# Altium PCB MENB-C-H-DET-S-V1.2 2019.5.27.PcbDoc (part 2 of 2)
Units mil, origin at the board's own origin, x right, y up, seen from the top; angles counter-clockwise.
Board outline 6102.36 x 4921.26 mil, 4 copper layers (Top Layer, GND, PWR, Bottom Layer); 148 components, 226 nets, 628 pads, 138 vias.
Unrouted connection lines stored in the file: 1.
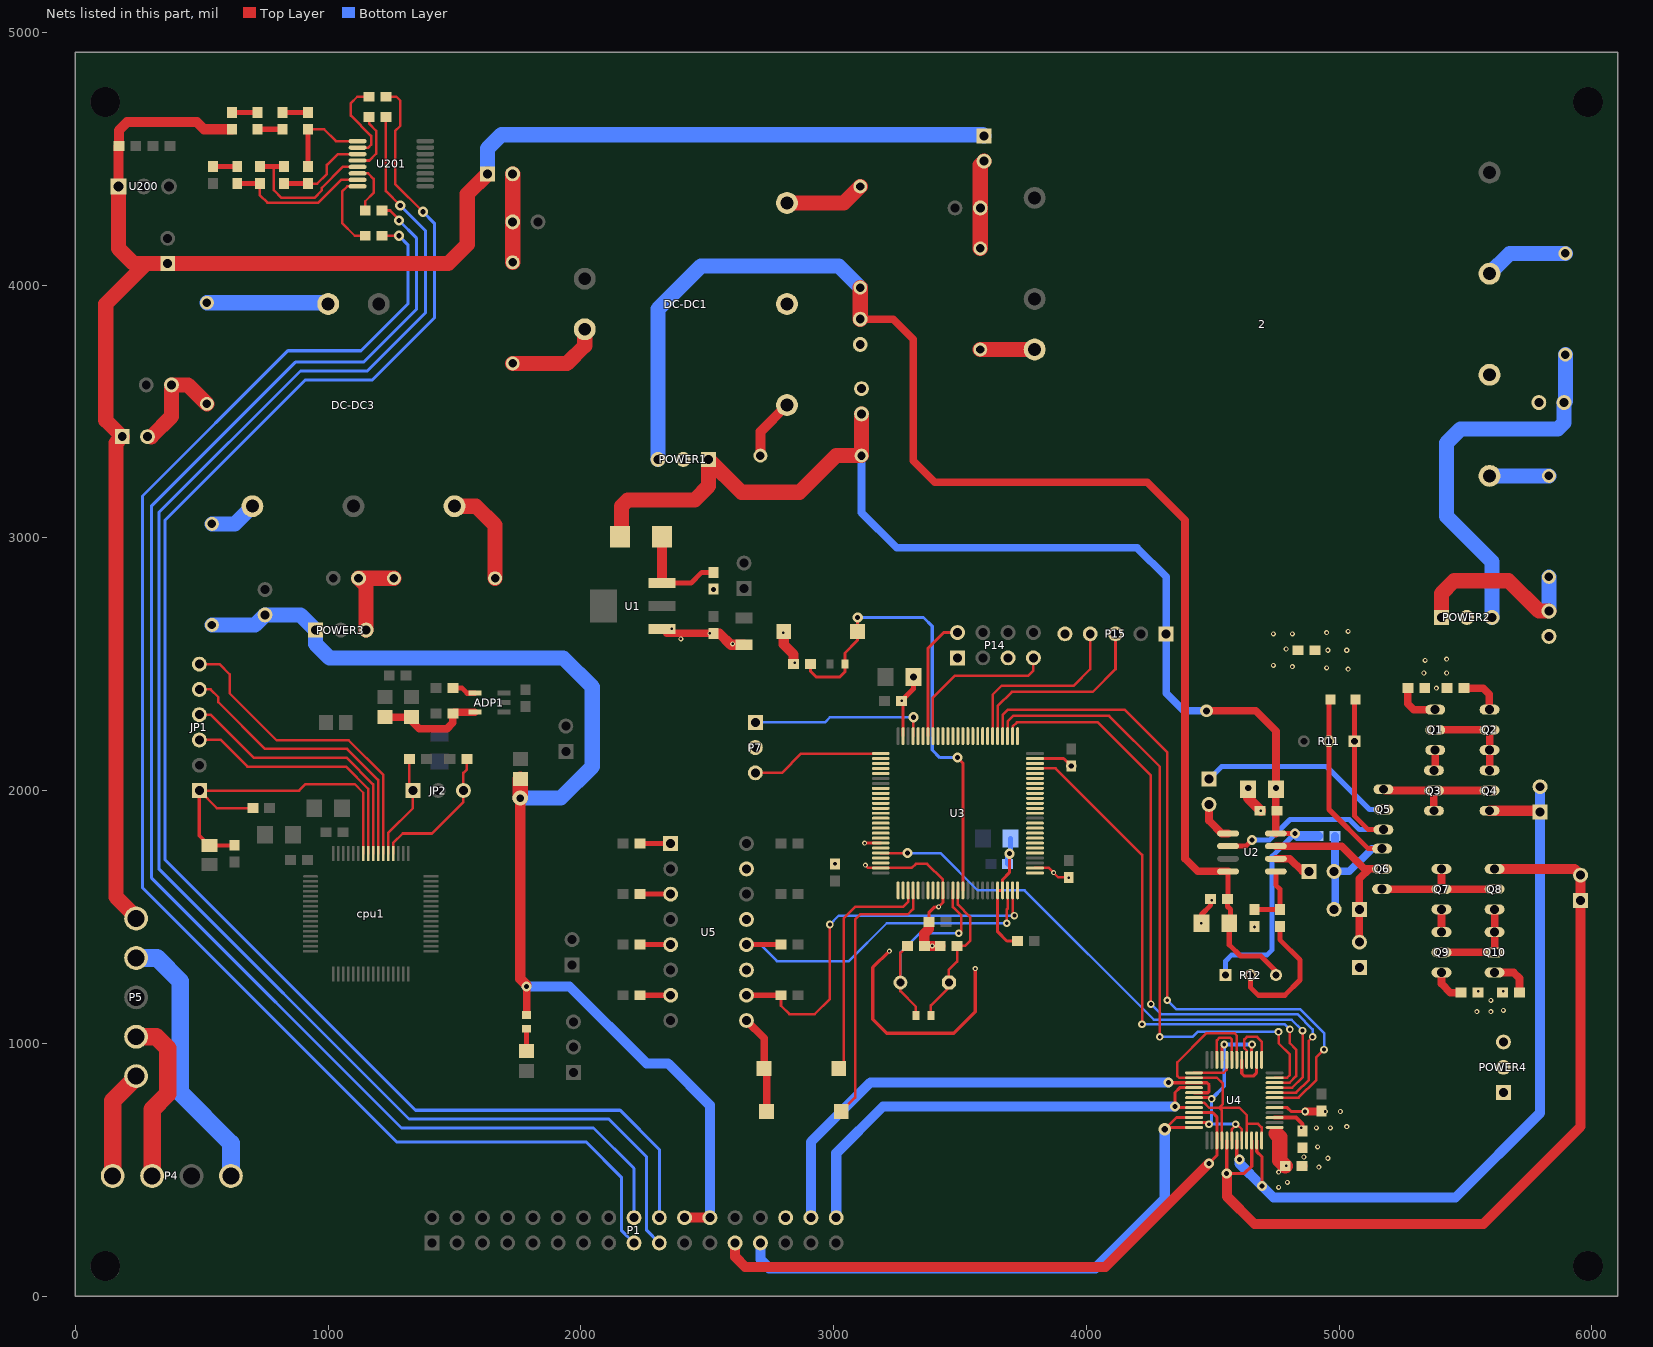
[diagram p4: the nets of this part, all layers, seen from the top]

## Via types
v1: diameter 20, hole 10, Top Layer to Bottom Layer, 61 vias
v2: diameter 40, hole 20, Top Layer to Bottom Layer, tented both sides, 41 vias
v3: diameter 30, hole 15, Top Layer to Bottom Layer, tented both sides, 20 vias
v4: diameter 50, hole 25, Top Layer to Bottom Layer, 5 vias
v5: diameter 50, hole 25, Top Layer to Bottom Layer, tented both sides, 4 vias
v6: diameter 40, hole 20, Top Layer to Bottom Layer, 2 vias
v7: diameter 50, hole 28, Top Layer to Bottom Layer, 2 vias
v8: diameter 60, hole 30, Top Layer to Bottom Layer, tented both sides, 1 vias
v9: diameter 31, hole 15, Top Layer to Bottom Layer, tented both sides, 1 vias
v10: diameter 30, hole 15, Top Layer to Bottom Layer, 1 vias

## Nets (pads, with @x,y where several pads share a name; then routed paths per layer and width w, separated by ;. In a path a pad name is that pad's centre, name@x,y a point inside that pad or via, vN(x,y) a via of type N, cw(c..) or ccw(c..) an arc to the next point about the centre after c; other vN are vias at no path point) (continued)
GND5V2: C11.1 C19.1 C20.2 C21.2 C22.2 C23.1 C24.1 C25.1 C26.2 C27.2 C30.2 C33.1 C34.2 C35.2 C36.2 C37.2 C38.2 C39.2 C100.1 DC-DC1.4 K1.2 K2.2 P1.30 P7.2 P14.1 P14.3 P15.5 P_C2.2 P_C3.1 POWER1.2 R20.1 S1.4 U1.1 U3.10 U3.27 U3.49 U3.74 U3.94 U3.99 U4.17 U5.9 U5.11 U5.13 U5.15 | length 3468
  Top Layer w10: v1(3125,1705) 3136.42,1693.58 U3.99@3186.1,1693.58 3308.58,1693.58 3325,1710 3370,1710 3432.16,1647.84 U3.10@3432.16,1605 ; U3.27@3796.34,1693.58 3851.42,1693.58 3888.46,1656.54 C36.2@3923.46,1656.54
  Top Layer w11: v1(3122.01,1792.01) U3.94@3186.1,1792.01
  Top Layer w12: U3.74@3274.69,2215.24 C38.2@3274.69,2355 ; C35.2@3376.54,1480 3376.54,1516.54 3400,1540 v1(3415,1540) 3432.16,1557.16 U3.10@3432.16,1605 ; U3.49@3796.34,2126.65 3909.88,2126.65 v2(3940,2096.54)
  Top Layer w13: K1.2@2724.72,900 K1.2@2734.72,890 ; v1(3220,1365) 3155,1300 3155,1095 3210,1040 3475,1040 3560,1125 v1(3560,1295) ; U4.17@4744.45,745.47 4794.53,745.47 4810,730 v10(4865,730)
  Top Layer w20: C38.2@3268.46,2355 3315.12,2401.65 v7(3315.12,2450) ; C23.1@4454.88,1475 4454.88,1509.88 4491.54,1546.54 C24.1@4491.54,1570
  Top Layer w30: U1.1@2339.06,2621.54 C19.1@2525,2621.54 ; U5.9@2655,1090 2724.72,1020.28 K1.2@2724.72,900 ; K2.2@2734.72,730 K1.2@2734.72,890 ; v10(4865,730) C27.2@4928.46,730
  Top Layer w40: 2548.46,2621.54 2593.15,2576.85 C20.2@2645,2576.85 ; S1.4@2802.28,2630 2802.28,2577.72 2841.54,2538.46 C33.1@2841.54,2500 ; C35.2@3376.54,1480 3376.54,1451.54 3358.46,1433.46 C26.2@3358.46,1385 C30.2@3421.54,1385 ; C21.2@4640,1970 v1(4690,1920)
  other v1: 4945,730 5005,730 3390,1385 4665,1460 4455,1475 4495,1565 3930,1655 3870,1675 3270,2355 4815,2490 4740,2495 2845,2505 4790,2560 2600,2580 2395,2600 4740,2620 4815,2620 2510,2621.54 2800,2625 2360,2640
  other v2: 2525,2795
  other v3: 3005,1710
  other v4: 4640,2010
GND60V: 2.4 C28.2 C29.2 P_C4.2 P_C6.1 POWER2.2 POWER4.1 POWER4.2 POWER4.3 R20.2 | length 1.5
  Top Layer w40: C29.2@4853.46,515 C29.2@4855,515
  other v1: 4920,510 4955,545 4860,550 4915,590 5035,2480 4950,2485 4955,2555 5030,2555 4950,2625 5035,2630
IN1: R205.1 R208.2 U201.1 | length 363.7
  Top Layer w10: R205.1@920,4616.54 983.46,4616.54 1030.43,4569.57 U201.1@1116.14,4569.57
  Top Layer w20: R208.2@920,4468.46 R205.1@920,4616.54
IN2: R208.1 R209.2 U201.3 | length 360
  Top Layer w10: R208.1@920,4401.54 956.54,4401.54 995,4440 995,4475 1038.39,4518.39 U201.3@1116.14,4518.39
  Top Layer w20: R209.2@825,4401.54 R208.1@920,4401.54
IN3: R209.1 R210.2 U201.5 | length 588.5
  Top Layer w10: 785,4468.46 785,4375 815,4345 945,4345 975,4375 975,4385 1057.2,4467.2 U201.5@1116.14,4467.2
  Top Layer w20: R210.2@730,4468.46 785,4468.46 R209.1@825,4468.46
IN4: R210.1 R211.2 U201.7 | length 572
  Top Layer w10: R210.1@730,4401.54 730,4355 759,4326 961,4326 1051.02,4416.02 U201.7@1116.14,4416.02
  Top Layer w20: R211.2@640,4401.54 R210.1@730,4401.54
IN_+12V: C200.2 DC12V_IN.1 P5.5 P_F1.1 P_F2.1 P_F3.1 R200.2 U200.1 | length 7508.2
  Top Layer w40: U200.1@170,4390 C200.2@170,4548.46 ; C200.2@171.54,4550 171.54,4611.54 205,4645 480,4645 508.46,4616.54 R200.2@620,4616.54
  Top Layer w60: U200.1@170,4390 170,4145 230,4085 280,4085 ; P5.5@245,1493.62 160,1578.62 160,3375 P_F3.1@185,3400 120,3465 120,3925 280,4085 ; P_F1.1@1630,4440 1550,4360 1550,4160 1475,4085 DC12V_IN.1@365,4085 280,4085
  Bottom Layer w60: P_F1.1@1630,4440 1630,4540 1685,4595 3590,4595 P_F2.1@3595,4590
INPUT_IN1: R2.2 U3.23 U5.12 | length 1381.9
  Top Layer w10: v3(3685,1475) 3685,1530 3688.07,1533.07 U3.23@3688.07,1605
  Top Layer w20: U5.12@2660,1390 R2.2@2791.54,1390
  Bottom Layer w10: U5.12@2655,1390 2710,1390 2775,1325 3060,1325 3210,1475 v3(3685,1475)
INPUT_IN2: R7.1 U3.24 U5.10 | length 1542.7
  Top Layer w10: R7.1@2791.54,1190 2791.54,1148.46 2825,1115 2925,1115 2985,1175 v3(2985,1470) ; U3.24@3707.76,1605 3707.76,1512.24 v3(3715,1505)
  Top Layer w20: U5.10@2660,1190 R7.1@2786.54,1190
  Bottom Layer w10: v3(2985,1470) 3020,1505 v3(3715,1505)
INPUT_IN3: U3.25
INPUT_IN4: U3.26
LED1: U3.97
LED2: U3.98
LED3: U3.1
LED4: U3.2
LED_HIGH: P1.17 R207.2 | length 5915.8
  Top Layer w10: R207.2@1213.46,4195 v2(1280,4195)
  Bottom Layer w12: v2(1280,4195) 1315,4160 1315,3925 1130,3740 840,3740 265,3165 265,1615 1270,610 2020,610 2160,470 2160,260 P1.17@2210,210
LED_LOW: P1.20 R203.2 | length 6435.9
  Top Layer w10: R203.2@1228.46,4745 1270,4745 1285,4730 1285,4630 1265,4610 1265,4400 v2(1375,4290)
  Bottom Layer w12: v2(1375,4290) 1420,4245 1420,3870 1175,3625 910,3625 355,3070 355,1725 1345,735 2155,735 2310,580 P1.20@2310,310
LED_MEDIUM: P1.18 R206.2 | length 5889.5
  Top Layer w10: R206.2@1213.46,4295 1245,4295 1280,4260 v2(1280,4255)
  Bottom Layer w12: v2(1280,4255) 1350,4185 1350,3905 1140,3695 870,3695 300,3125 300,1655 1290,665 2050,665 2210,505 P1.18@2210,310
LED_MEDIUMLOW: P1.19 R204.2 | length 6395
  Top Layer w10: R204.2@1228.46,4665 1228.46,4371.54 v2(1285,4315)
  Bottom Layer w12: v2(1285,4315) 1385,4215 1385,3890 1155,3660 890,3660 330,3100 330,1690 1320,700 2110,700 2260,550 2260,260 P1.19@2310,210
LI_12V: P4.1 P5.4 | length 1061.2
  Bottom Layer w70: P5.4@245,1337.72 322.28,1337.72 415,1245 415,805 615,605 P4.1@615,475
LI_CRG+: P4.3 P5.2 | length 669.6
  Top Layer w70: P5.2@245,1025.91 319.09,1025.91 365,980 365,800 303.19,738.19 P4.3@303.19,475
LI_CRG-: P4.4 P5.1 | length 435.5
  Top Layer w70: P4.4@147.28,475 147.28,772.28 P5.1@245,870
MAX14803_CLK: U3.52 U4.20 | length 2628
  Top Layer w10: U3.52@3707.76,2215.24 3707.76,2252.76 3725,2270 4045,2270 4255,2060 v3(4255,1155) ; U4.20@4744.45,804.53 4829.53,804.53 4880,855 4880,1010 v3(4895,1025)
  Bottom Layer w10: v3(4255,1155) 4295,1115 4835,1115 4895,1055 v3(4895,1025)
MAX14803_CLR: U3.47 U4.22 | length 2120.4
  Top Layer w10: U3.47@3796.34,2087.28 3877.72,2087.28 4220,1745 v3(4220,1075) ; U4.22@4744.45,843.9 4803.9,843.9 4830,870 4830,975 4805,1000 v3(4805,1055)
  Bottom Layer w10: v3(4220,1075) 4785,1075 v3(4805,1055)
MAX14803_DIN: U3.54 U4.19 | length 2860
  Top Layer w10: U3.54@3668.39,2215.24 3668.39,2298.39 3690,2320 4150,2320 4320,2150 v3(4320,1170) ; U4.19@4744.45,784.84 4839.84,784.84 4910,855 4910,945 v3(4940,975)
  Bottom Layer w10: v3(4320,1170) 4355,1135 4845,1135 4940,1040 v3(4940,975)
MAX14803_DOUT: U3.53 U4.23 | length 2553.9
  Top Layer w10: U3.53@3688.07,2215.24 3688.07,2273.07 3710,2295 4090,2295 4290,2095 v3(4290,1025) ; U4.23@4744.45,863.58 4793.58,863.58 4805,875 4805,955 4760,1000 v3(4760,1045)
  Bottom Layer w10: v3(4290,1025) 4420,1025 4440,1045 v3(4760,1045)
MAX14803_NLE: U3.96 U4.21 | length 2272.4
  Top Layer w10: U3.96@3186.1,1752.64 v2(3292.64,1752.64) ; U4.21@4744.45,824.21 4814.21,824.21 4855,865 v3(4855,1050)
  Bottom Layer w10: v2(3292.64,1752.64) 3422.36,1752.64 3570,1605 3755,1605 4267,1093 4812,1093 v3(4855,1050)
Net2_2: 2.2 P_L4.2 | length 215
  Top Layer w60: P_L4.2@3580,3745 2.2@3795,3745
Net2_3: 2.3 P_L6.1 | length 333.1
  Bottom Layer w60: 2.3@5595,4045 5675,4125 P_L6.1@5895,4125
Net2_5: 2.5 P_L5.1 | length 235
  Bottom Layer w60: 2.5@5595,3245 P_L5.1@5830,3245
NetADP1_4: ADP1.4 C3.1 | length 94.9
  Top Layer w20: C3.1@1493.46,2405.2 1529.8,2405.2 1550,2385 ADP1.4@1580,2385
NetADP1_5: ADP1.5 C2.1 R3.2 R4.2 | length 408.9
  Top Layer w20: C2.1@1493.46,2305.2 C2.1@1498.46,2310.2
  Top Layer w30: R3.2@1225,2290.63 R4.2@1330,2290.63 ; R4.2@1335,2270 1360,2245 1470,2245 1493.46,2268.46 C2.1@1493.46,2305.2 ; C2.1@1498.46,2310.2 ADP1.5@1580,2310.2
NetC5_2: C5.2 cpu1.53 JP2.1 | length 420.6
  Top Layer w10: cpu1.53@1237.09,1750.55 1237.09,1832.09 1335,1930 JP2.1@1335,2000 1321.54,2013.46 C5.2@1321.54,2125
NetC6_2: C6.2 cpu1.52 JP2.3 | length 562.6
  Top Layer w10: cpu1.52@1256.77,1750.55 1256.77,1791.77 1295,1830 1410,1830 1535,1955 JP2.3@1535,2000 1535,2070 1548.46,2083.46 C6.2@1548.46,2125
NetC11_2: C11.2 D1.K U1.3 | length 404.9
  Top Layer w20: U1.3@2321.14,2820.55 2435.55,2820.55 2478.46,2863.46 C11.2@2525,2863.46
  Top Layer w40: U1.3@2320,2821.69 D1.K@2320,3005
NetC25_2: C25.2 R13.1 U2.5 | length 258
  Top Layer w20: C25.2@4665,1528.46 R13.1@4765,1528.46 4765,1610 4749.49,1625.51 U2.5@4749.49,1680
NetC100_2: C100.2 P12.1 Q6.2 U2.7 | length 764.4
  Top Layer w30: U2.7@4749.49,1780 5010,1780 5100,1690 5120,1690 ; C100.2@5080,1400 P12.1@5080,1530 5080,1650 5120,1690 ; Q6.2@5170,1690 5120,1690
NetDC-DC1_1: DC-DC1.1 P_L2.2 | length 379
  Top Layer w60: P_L2.2@1730,3690 1945,3690 2015,3760 DC-DC1.1@2015,3825
NetDC-DC1_3: DC-DC1.3 P_L3.1 | length 316.9
  Top Layer w60: DC-DC1.3@2815,4325 3040,4325 P_L3.1@3105,4390
NetDC-DC1_5: DC-DC1.5 P_L1.1 | length 243.5
  Top Layer w40: P_L1.1@2710,3325 2710,3420 DC-DC1.5@2815,3525
NetDC-DC3_1: DC-DC3.1 P_L7.2 | length 482.1
  Bottom Layer w40: DC-DC3.1@995,3930 DC-DC3.1@1000,3925
  Bottom Layer w60: P_L7.2@520,3930 DC-DC3.1@995,3930
NetDC-DC3_3: DC-DC3.3 P_L9.1 | length 401.1
  Top Layer w60: DC-DC3.3@1500,3125 1585,3125 1660,3050 P_L9.1@1660,2840
NetDC-DC3_5: DC-DC3.5 P_L8.1 | length 189
  Bottom Layer w60: P_L8.1@540,3055 630,3055 DC-DC3.5@700,3125
NetLED10_1: LED10.1 R60.1 | length 88.1
  Top Layer w20: LED10.1@1785,969.37 R60.1@1785,1057.44
NetP10_1: P10.1 U2.6 | length 151.2
  Top Layer w30: U2.6@4749.49,1730 4805,1730 4855,1680 P10.1@4880,1680
NetP10_2: P10.2 P12.2 pad.0@4965,2360 Q6.1 R11.2 R100.1 | length 1229.2
  Top Layer w20: pad.0@4960,2360 R11.2@4960,2195 4960,1925 5115,1770 Q6.1@5170,1770
  Bottom Layer w30: P12.2@4980,1530 4985,1535 4985,1710 4983.46,1711.54 R100.1@4983.46,1820 ; P10.2@4980,1680 5040,1680 5130,1770 Q6.1@5170,1770
NetP11_1: P11.1 Q5.2 | length 781.1
  Bottom Layer w20: P11.1@4485,2045 4535,2095 4950,2095 5120,1925 Q5.2@5175,1925
NetP11_2: P11.2 U2.1 | length 161.2
  Top Layer w30: P11.2@4485,1945 4485,1880 4535,1830 U2.1@4560.51,1830
NetP_C1_1: P_C1.1 P_F1.2 P_L2.1 | length 350
  Top Layer w60: P_L2.1@1730,4090 P_C1.1@1730,4250 P_F1.2@1730,4440
NetP_C5_1: P_C5.1 P_F2.2 P_L4.1 | length 351.2
  Top Layer w60: P_L4.1@3580,4145 P_C5.1@3580,4305 3580,4475 P_F2.2@3595,4490
NetP_C7_1: P_C7.1 P_F3.2 P_L7.1 | length 424.2
  Top Layer w40: P_F3.2@285,3400 P_F3.2@300,3400
  Top Layer w60: P_F3.2@300,3400 380,3480 P_C7.1@380,3605 445,3605 P_L7.1@520,3530
NetQ1_1: Q1.1 R9.1 | length 174.7
  Top Layer w30: R9.1@5271.54,2405 5271.54,2343.46 5295,2320 Q1.1@5375,2320
NetQ1_2: Q1.2 Q2.2 Q2.3 Q4.1 | length 375
  Top Layer w30: Q1.2@5380,2240 Q2.2@5595,2240 Q2.3@5595,2160 Q4.1@5595,2080
NetQ1_3: Q1.3 Q3.1 | length 75
  Top Layer w30: Q3.1@5380,2085 Q1.3@5380,2160
NetQ2_1: Q2.1 R10.1 | length 169.7
  Top Layer w30: R10.1@5493.46,2405 5570,2405 5593.46,2381.54 Q2.1@5593.46,2321.54
NetQ3_2: Q3.2 Q3.3 Q4.2 Q5.3 | length 502.1
  Top Layer w30: Q5.3@5175,2005 5180,2000 Q3.2@5375,2000 ; Q3.3@5375,1920 Q3.2@5375,2000 ; Q4.2@5595,2000 Q3.2@5375,2000
NetQ5_1: pad.0@5065,2360 Q5.1 R11.1 U2.2 | length 1274.4
  Top Layer w20: U2.2@4560.51,1780 4630,1780 v2(4655,1805) ; pad.0@5065,2360 5060,2355 R11.1@5060,2195 5060,1900 5115,1845 Q5.1@5175,1845
  Bottom Layer w20: v2(4655,1805) 4725,1805 4805,1885 5040,1885 5080,1845 Q5.1@5175,1845
NetQ6_3: Q6.3 Q7.2 Q7.3 Q8.2 | length 525
  Top Layer w30: Q6.3@5170,1610 Q7.2@5405,1610 ; Q7.3@5405,1690 Q7.2@5405,1610 ; Q8.2@5615,1610 Q7.2@5405,1610
NetQ7_1: Q7.1 Q9.3 | length 90
  Top Layer w30: Q9.3@5405,1440 Q7.1@5405,1530
NetQ8_1: Q8.1 Q9.2 Q10.2 Q10.3 | length 380
  Top Layer w30: Q9.2@5405,1360 Q10.2@5615,1360 Q10.3@5615,1440 Q8.1@5615,1530
NetQ9_1: Q9.1 R14.2 | length 136
  Top Layer w30: Q9.1@5405,1280 5405,1235 5440,1200 R14.2@5481.54,1200
NetQ10_1: Q10.1 R15.2 | length 164.7
  Top Layer w30: Q10.1@5615,1280 5690,1280 5713.46,1256.54 R15.2@5713.46,1200
NetR8_2: R8.2 U5.5 | length 126.5
  Top Layer w20: R8.2@2233.46,1390 U5.5@2355,1390 U5.5@2360,1390
NetR12_2: R12.2 R13.2 | length 527
  Top Layer w20: R12.2@4650,1270 4650,1220 4680,1190 4785,1190 4845,1250 4845,1330 4765,1410 R13.2@4765,1461.54
NetR19_2: R19.2 U5.7 | length 126.5
  Top Layer w20: R19.2@2233.46,1190 U5.7@2355,1190 U5.7@2360,1190
NetR23_2: R23.2 U5.1 | length 121.5
  Top Layer w20: R23.2@2233.46,1790 U5.1@2355,1790
NetR24_2: R24.2 U5.3 | length 121.5
  Top Layer w20: R24.2@2233.46,1590 U5.3@2355,1590
NetR200_1: R200.1 R201.2 | length 100
  Top Layer w20: R200.1@620,4683.46 R201.2@720,4683.46
NetR201_1: R201.1 R202.2 | length 100
  Top Layer w20: R201.1@720,4616.54 R202.2@820,4616.54
NetR202_1: R202.1 R205.2 | length 100
  Top Layer w20: R202.1@820,4683.46 R205.2@920,4683.46
NetR203_1: R203.1 U201.2 | length 338.5
  Top Layer w10: U201.2@1116.14,4543.98 1158.98,4543.98 1170,4555 1170,4590 1090,4670 1090,4720 1115,4745 R203.1@1161.54,4745
NetR204_1: R204.1 U201.4 | length 241.9
  Top Layer w10: U201.4@1116.14,4492.8 1162.8,4492.8 1190,4520 1190,4610 1161.54,4638.46 R204.1@1161.54,4665
NetR206_1: R206.1 U201.6 | length 211.7
  Top Layer w10: U201.6@1116.14,4441.61 1158.39,4441.61 1180,4420 1180,4365 1146.54,4331.54 R206.1@1146.54,4295
NetR207_1: R207.1 U201.8 | length 306.9
  Top Layer w10: U201.8@1116.14,4390.43 1075.43,4390.43 1055,4370 1055,4245 1105,4195 R207.1@1146.54,4195
NetR211_1: R211.1 R212.2 | length 95
  Top Layer w20: R212.2@545,4468.46 R211.1@640,4468.46
NetU4_4: U4.4 U4.9 U4.12 U4.30 U4.38 U4.43 | length 1310.2
  Top Layer w10: U4.43@4425.55,765.16 4464.84,765.16 4485,745 4525,745 ; U4.4@4535.79,615.55 4535.79,734.21 4525,745 ; U4.30@4594.84,934.45 4594.84,1030.16 4585,1040 4475,1040 4360,925 4360,870 4366.42,863.58 U4.38@4425.55,863.58 4516.42,863.58 4540,840 4540,760 4525,745 ; U4.9@4634.21,615.55 4634.21,680.79 ; U4.12@4693.27,615.55 4693.27,666.73 4679.21,680.79 4634.21,680.79 ; 4525,745 4605,745 4634.21,715.79 4634.21,680.79
NetU4_6: U4.6 U4.8 U4.27 U4.33 U4.42 U4.47 | length 954.9
  Top Layer w10: v3@4478.58,686.42 v3(4485,680) ; v3@4490.16,784.84 v3(4495,780) ; U4.6@4575.16,615.55 4575.16,660.16 4590,675 4600,675 4614.53,660.47 U4.8@4614.53,615.55 ; v3@4653.9,993.9 v3(4655,995)
  Top Layer w12: U4.47@4425.55,686.42 v3@4478.58,686.42 ; U4.42@4425.55,784.84 v3@4490.16,784.84 ; U4.33@4535.79,934.45 4535.79,985.79 v3(4545,995) ; U4.27@4653.9,934.45 v3@4653.9,993.9
  Bottom Layer w12: v3(4495,780) 4495,690 v3(4485,680) v3(4590,680)
  Bottom Layer w15: v3(4495,780) 4545,830 v3(4545,995) v3(4655,995)
NRST: C33.2 R17.1 S1.1 U3.14 | length 1863.5
  Top Layer w10: v2@3093.62,2683.62 v2(3095,2685)
  Top Layer w12: C33.2@2908.46,2500 2908.46,2471.54 2930,2450 3025,2450 3044.53,2469.53 R17.1@3044.53,2500 3044.53,2544.53 3093.62,2593.62 S1.1@3093.62,2630 v2@3093.62,2683.62 ; v2(3490,2130) 3510.9,2109.09 U3.14@3510.9,1605
  Bottom Layer w12: v2(3095,2685) 3355,2685 3390,2650 3390,2160 3420,2130 v2(3490,2130)
OSC_IN: C26.1 R16.2 U3.12 Y1.2 | length 881.4
  Top Layer w10: C26.1@3291.54,1385 3263.94,1357.4 Y1.2@3263.94,1240 3263.94,1206.06 3325.47,1144.53 R16.2@3325.47,1110 ; U3.12@3471.53,1605 3471.53,1538.47 3505,1505 3505,1445 v3(3495,1435)
  Bottom Layer w10: Y1.2@3263.94,1240 3263.94,1358.94 3340,1435 v3(3495,1435)
OSC_OUT: C30.1 R16.1 U3.13 Y1.1 | length 575.5
  Top Layer w10: R16.1@3384.53,1110 3384.53,1149.53 Y1.1@3453.46,1218.46 ; Y1.1@3456.06,1240 3456.06,1291.06 3488.46,1323.46 C30.1@3488.46,1385 3520,1385 3540,1405 3540,1500 3491.22,1548.78 U3.13@3491.22,1605
OUT1+: P1.25 U4.3 U4.45 | length 2410.7
  Top Layer w12: U4.45@4425.55,725.79 4499.21,725.79 4516.1,708.9 U4.3@4516.1,615.55 4516.1,556.1 v2(4485,525)
  Top Layer w40: P1.25@2610,210 2610,155 2650,115 4075,115 v2(4485,525)
OUT1-: P1.27 U4.46 U4.48 | length 2311.9
  Top Layer w12: v4(4310,660) v4@4316.73,666.73 ; U4.48@4425.55,666.73 v4@4316.73,666.73 ; U4.46@4425.55,706.1 4356.1,706.1 v4@4316.73,666.73
  Bottom Layer w40: P1.27@2710,210 2710,145 2745,110 4035,110 4310,385 v4(4310,660)
OUT2+: P1.34 U4.40 U4.44 | length 1884.4
  Top Layer w12: U4.44@4425.55,745.47 4360,745.47 4350,755.47 4350,805 4369.21,824.21 U4.40@4425.55,824.21
  Bottom Layer w40: P1.34@3010,310 3010,565 3195,750 v2(4350,750)
OUT2-: P1.32 U4.39 U4.41 | length 2061.6
  Top Layer w13: v2@4326.1,843.9 U4.39@4425.55,843.9 4476.1,843.9 4485,835 4485,810 4479.53,804.53 U4.41@4425.55,804.53
  Bottom Layer w40: P1.32@2910,310 2910,610 3145,845 v2(4325,845)
OUT3+: U4.32 U4.37 | length 174
  Top Layer w10: U4.37@4425.55,883.27 4543.27,883.27 4555.47,895.47 U4.32@4555.47,934.45
OUT3-: U4.31 U4.34 | length 223.6
  Top Layer w10: U4.34@4516.1,934.45 4516.1,1011.1 4527,1022 4568,1022 4575.16,1014.84 U4.31@4575.16,934.45
OUT4+: U4.26 U4.29 | length 173.9
  Top Layer w12: U4.29@4614.53,934.45 4614.53,880.47 4625,870 4660,870 4673.58,883.58 U4.26@4673.58,934.45
OUT4-: U4.25 U4.28 | length 236.6
  Top Layer w10: U4.28@4634.21,934.45 4634.21,970.79 4625,980 4625,1015 4635,1025 4675,1025 4693.27,1006.73 U4.25@4693.27,934.45
P3V3A: C31.2 C32.1 R18.2 U3.21 U3.22 | length 537.1
  Top Layer w12: v2(3695,1750) 3695,1675 3668.39,1648.39 U3.22@3668.39,1605 U3.21@3648.7,1605 3648.7,1441.3 3685,1405 R18.2@3726.54,1405
  Bottom Layer w20: C31.2@3688.46,1710 3688.46,1743.46 v2(3695,1750) 3700.16,1755.16 C32.1@3700.16,1810
PA5: U3.30
PA6: U3.31
PA7: U3.32
PA8: U3.67
PA9: P14.4 U3.68 | length 644.2
  Top Layer w10: U3.68@3392.8,2215.24 3392.8,2367.8 3480,2455 3770,2455 3790,2475 P14.4@3790,2525
PA10: P14.5 U3.69 | length 490.4
  Top Layer w12: U3.69@3373.11,2215.24 3373.11,2563.11 3435,2625 P14.5@3490,2625
PA11: U3.70
PA12: U3.71
PA13: P7.1 U3.72 | length 708.4
  Top Layer w10: U3.72@3314.06,2215.24 3314.06,2289.05 v2(3315,2290)
  Bottom Layer w10: P7.1@2690,2270 2965,2270 2985,2290 v2(3315,2290)
PA14: P7.3 U3.76 | length 527.7
  Top Layer w10: P7.3@2690,2070 2795,2070 2871.34,2146.34 U3.76@3186.1,2146.34
PA15: U3.77
PB0: U3.35
PB1: U3.36
PB3: U3.89
PB4: U3.90
PB5: U3.91
PB6: U3.92
PB7: U3.93
PB8: U3.95
PB11: U3.48
PB12: U3.51
PC4: U3.33
PC5: U3.34
PC6: U3.63
PC7: U3.64
PC8: U3.65
PC9: U3.66
PC10: U3.78
PC11: U3.79
PC12: U3.80
PC13: U3.7
PC14: U3.8
PC15: U3.9
PD2: U3.83
PD3: U3.84
PD4: U3.85
PD5: U3.86
PD6: U3.87
PD7: U3.88
PD8: P15.3 U3.55 | length 785.4
  Top Layer w10: U3.55@3648.7,2215.24 3648.7,2333.7 3705,2390 4025,2390 4115,2480 P15.3@4115,2620
PD9: P15.4 U3.56 | length 731.6
  Top Layer w10: U3.56@3629.02,2215.24 3629.02,2379.01 3665,2415 3950,2415 4015,2480 P15.4@4015,2620
PD10: U3.57
PD11: U3.58
PD12: U3.59
PD13: U3.60
PD14: U3.61
PD15: U3.62
PE4: K1.1 U3.3 | length 942
  Top Layer w10: K1.1@3015,890 3040,915 3040,1495 3085,1540 3275,1540 3294.37,1559.37 U3.3@3294.37,1605
PE5: K2.1 U3.4 | length 1102.9
  Top Layer w10: K2.1@3030,730 3085,785 3085,1490 3105,1510 3293.11,1510 3314.06,1530.95 U3.4@3314.06,1605
PE6: U3.5
PE7: U3.38
PE8: U3.39
PE9: U3.40
PE10: U3.41
PE11: U3.42
PE12: U3.43
PE13: U3.44
PE14: U3.45
PE15: U3.46
RST1: C4.2 cpu1.58 DS1.1 JP1.1 R1.1 | length 1488.9
  Top Layer w10: R1.1@628.94,1782.4 R1.1@630,1783.46 ; C4.2@701.54,1930 560,1930 JP1.1@490,2000 885,2000 910,2025 1105,2025 1138.66,1991.34 cpu1.58@1138.66,1750.55
  Top Layer w15: JP1.1@490,2000 490,1822.4 DS1.1@530,1782.4 R1.1@628.94,1782.4
STIM+: P8.1 P8.2 Q4.3 U4.7 U4.11 | length 3160.9
  Top Layer w13: U4.7@4594.84,615.55 4594.84,550.16 v6(4605,540) ; U4.11@4673.58,615.55 4673.58,571.42 4695,550 v2(4695,435)
  Top Layer w40: Q4.3@5595,1920 5790,1920 P8.1@5795,1915
  Bottom Layer w40: v6(4605,540) 4605,525 v2(4695,435) 4740,390 5460,390 5795,725 P8.2@5795,2015
STIM-: P9.1 P9.2 Q8.3 U4.5 U4.10 | length 3383.3
  Top Layer w13: v2(4555,485) 4625,485 4653.9,513.9 U4.10@4653.9,615.55 ; v2@4555.47,485 U4.5@4555.47,615.55
  Top Layer w40: v2@4555.47,485 4555.47,394.53 4665,285 5570,285 5955,670 P9.1@5955,1565 P9.2@5955,1665 5930,1690 Q8.3@5615,1690
TCK: cpu1.57 JP1.3 | length 1004.5
  Top Layer w10: JP1.3@490,2200 575,2200 680,2095 1070,2095 1158.35,2006.65 cpu1.57@1158.35,1750.55
TDI: cpu1.55 JP1.5 | length 1159.3
  Top Layer w10: JP1.5@490,2400 535,2400 565,2370 565,2350 750,2165 1075,2165 1197.72,2042.28 cpu1.55@1197.72,1750.55
TDO: cpu1.54 JP1.6 | length 1264.6
  Top Layer w10: JP1.6@490,2500 570,2500 610,2460 610,2385 796.37,2198.63 1081.37,2198.63 1217.4,2062.6 cpu1.54@1217.4,1750.55
TMS: cpu1.56 JP1.4 | length 1075.7
  Top Layer w10: JP1.4@490,2300 535,2300 705,2130 1071.87,2130 1177.35,2024.52 1177.35,1751.24 cpu1.56@1178.03,1750.55
VCC5V1: P1.22 P1.24 P_C8.1 P_L8.2 POWER3.1 R6.2 R60.2 | length 4731.7
  Top Layer w30: R60.2@1785,1112.56 v2@1785,1230
  Top Layer w40: v8(1760,1970) 1760,1255 v2@1785,1230 ; P1.22@2410,310 P1.24@2510,310
  Top Layer w60: v8(1760,1970) R6.2@1760,2045.63
  Bottom Layer w40: v2(1785,1225) 1955,1225 2260,920 2345,920 2510,755 P1.24@2510,310
  Bottom Layer w60: P_L8.2@540,2655 710,2655 P_C8.1@750,2695 890,2695 POWER3.1@950,2635 950,2580 1005,2525 1930,2525 2045,2410 2045,2095 1920,1970 v8(1760,1970)
VCC5V2: C21.1 C22.1 D1.A P15.1 P_C2.1 P_L1.2 POWER1.1 R12.1 R100.2 U2.8 | length 5307.2
  Top Layer w20: U2.8@4749.49,1830 v2(4825,1830) ; C21.1@4749.49,2004.37 C21.1@4750.12,2005
  Top Layer w30: v7(4475,2315) 4670,2315 4750.12,2234.88 C21.1@4750.12,2005 ; U2.8@4749.49,1830 C21.1@4749.49,2004.37
  Top Layer w60: D1.A@2160,3010 2160,3125 2185,3150 2450,3150 2505,3205 POWER1.1@2505,3310 2635,3180 2865,3180 3010,3325 P_L1.2@3110,3325 P_C2.1@3110,3490
  Bottom Layer w20: R12.1@4550,1270 4550,1325 4575,1350 4715,1350 4735,1370 4735,1740 v2(4825,1830)
  Bottom Layer w30: P_L1.2@3110,3325 3110,3100 3250,2960 4200,2960 4315,2845 P15.1@4315,2620 4315,2385 4385,2315 v7(4475,2315)
  Bottom Layer w40: v2(4825,1830) 4835,1820 R100.2@4916.54,1820
  other v4: 4750,2010
VCC60V: C28.1 P_C4.1 P_L5.2 POWER2.1 R9.2 R10.2 U4.15 | length 873.3
  Top Layer w15: U4.15@4744.45,706.1 4828.9,706.1 4855,680 C28.1@4855,653.46
  Top Layer w60: POWER2.1@5405,2685 5405,2780 5455,2830 5670,2830 5790,2710 P_C4.1@5830,2710
  Bottom Layer w60: P_C4.1@5830,2710 P_L5.2@5830,2845
  other v1: 4850,665 4910,665 4965,665 5030,670 5385,2405 5335,2465 5425,2465 5340,2515 5425,2520
VEE5V1: P_C9.2 P_L9.2 POWER3.3 | length 357.4
  Top Layer w60: POWER3.3@1150,2635 1150,2810 P_C9.2@1120,2840 P_L9.2@1260,2840
VEE5V2: C23.2 C24.2 P_C3.2 P_L3.2 POWER1.3 R12.3 U2.4 | length 5590.5
  Top Layer w20: C24.2@4558.46,1570 4558.46,1541.54 4570,1530 4570,1479.88 C23.2@4565.12,1475 4565.12,1389.88 4610,1345 4690,1345 4750,1285 R12.3@4750,1270 ; C24.2@4560.51,1572.05 U2.4@4560.51,1680
  Top Layer w30: P_C3.2@3105,3865 3235,3865 3315,3785 3315,3305 3400,3220 4240,3220 4390,3070 4390,1730 4440,1680 U2.4@4560.51,1680
  Top Layer w60: P_C3.2@3105,3865 P_L3.2@3105,3990
  Bottom Layer w60: POWER1.3@2305,3310 2305,3905 2475,4075 3020,4075 P_L3.2@3105,3990
VEE60V: C29.1 P_C6.2 P_L6.2 POWER2.3 R14.1 R15.1 U4.13 | length 1678.4
  Top Layer w60: 4750,643.51 4765,628.51 4765,536.54 C29.1@4786.54,515
  Bottom Layer w30: P_C6.2@5890,3535 P_C6.2@5895,3540
  Bottom Layer w60: POWER2.3@5605,2685 5605,2905 5425,3085 5425,3375 5480,3430 5865,3430 5890,3455 P_C6.2@5890,3535 ; P_C6.2@5895,3540 P_L6.2@5895,3725
  other v1: 4760,430 4795,450 4760,490 4790,515 5545,1125 5600,1125 5650,1130 5600,1170 5550,1205 5650,1205
pads on no net: 2.6 2.7 cpu1.7 cpu1.8 cpu1.9 cpu1.10 cpu1.11 JP2.2 P1.23 P1.26 P1.29 P14.2 P14.7 R11.3 U3.19 U3.73 U4.1 U4.2 U4.14 U4.16 U4.24 U4.35 U4.36 U201.10 U201.15

## Polygon pours and split planes (outlines as drawn)
GND60V on GND (split plane): 5914.92,3824.61 5914.92,335.39 5889.61,310.08 4865.39,310.08 4835.08,340.39 4835.08,614.61 4860.39,639.92 5095,639.92 5098.92,640.23 5102.75,641.15 5106.38,642.66 5109.74,644.71 5112.73,647.27 5162.73,697.27 5165.29,700.26 5167.34,703.62 5168.85,707.25 5169.77,711.08 5170.08,715 5170.08,1335 5169.77,1338.92 5168.85,1342.75 5167.34,1346.38 5165.29,1349.74 5162.73,1352.73 4895.08,1620.39 4895.08,3799.61 4935.39,3839.92 5899.61,3839.92
GND5V2 on GND (split plane): 3274.92,4064.61 3274.92,3380 3275.23,3376.08 3276.15,3372.25 3277.66,3368.62 3279.71,3365.26 3282.27,3362.27 3422.27,3222.27 3425.26,3219.71 3428.62,3217.66 3432.25,3216.15 3436.08,3215.23 3440,3214.92 4844.92,3214.92 4844.92,1610 4845.23,1606.08 4846.15,1602.25 4847.66,1598.62 4849.71,1595.26 4852.27,1592.27 5119.92,1324.61 5119.92,725.39 5084.61,690.08 4884.99,690.08 4884.74,690.29 4881.38,692.34 4877.75,693.85 4873.92,694.77 4870,695.08 3970,695.08 3966.08,694.77 3965.16,694.55 3962.25,693.85 3960.12,692.97 3958.62,692.34 3956.56,691.08 3955.26,690.29 3952.27,687.73 3852.27,587.73 3849.71,584.74 3847.66,581.38 3846.15,577.75 3845.23,573.92 3844.92,570 3844.92,80.39 3824.61,60.08 2360.39,60.08 2320.08,100.39 2320.08,4079.61 2340.39,4099.92 3239.61,4099.92
GND5V1 on GND (split plane): 2269.92,90 2270.23,86.08 2271.15,82.25 2272.66,78.62 2274.71,75.26 2277.27,72.27 2329.44,20.1 1855.1,20.1 1855.1,1725 1854.71,1728.92 1853.57,1732.69 1851.71,1736.17 1849.21,1739.21 1809.21,1779.21 1806.17,1781.71 1802.69,1783.57 1798.92,1784.71 1795,1785.1 903.32,1785.1 880.1,1808.32 880.1,3191.68 918.32,3229.9 2269.92,3229.9
GND on GND (split plane): 3979.92,4699.61 3979.92,3805.39 3964.61,3790.08 3445.39,3790.08 3410.08,3825.39 3410.08,4100 3409.77,4103.92 3408.85,4107.75 3407.34,4111.38 3405.29,4114.74 3402.73,4117.73 3307.73,4212.73 3304.74,4215.29 3301.38,4217.34 3297.75,4218.85 3293.92,4219.77 3290,4220.08 2165,4220.08 2161.08,4219.77 2157.25,4218.85 2153.62,4217.34 2150.26,4215.29 2147.27,4212.73 2107.27,4172.73 2104.71,4169.74 2102.66,4166.38 2101.15,4162.75 2100.23,4158.92 2099.92,4155 2099.92,3385.39 2069.61,3355.08 895,3355.08 891.08,3354.77 887.25,3353.85 883.62,3352.34 880.26,3350.29 877.27,3347.73 797.27,3267.73 794.71,3264.74 792.66,3261.38 791.15,3257.75 790.23,3253.92 789.92,3250 789.92,265.08 140.08,265.08 140.08,4524.61 390.39,4774.92 3904.61,4774.92
no net on GND (split plane): 248 vertices, not listed, extent 20.1,20.1 6082.27,4901.16
VCC60V on PWR (split plane): 5479.92,2779.61 5479.92,835.39 5279.61,635.08 4725.08,635.08 4725.08,640 4724.77,643.92 4723.85,647.75 4722.34,651.38 4720.29,654.74 4717.73,657.73 4700.08,675.39 4700.08,754.61 4745.39,799.92 4915,799.92 4918.92,800.23 4922.75,801.15 4926.38,802.66 4929.74,804.71 4932.73,807.27 5177.73,1052.27 5180.29,1055.26 5182.34,1058.62 5183.85,1062.25 5184.77,1066.08 5185.08,1070 5185.08,2759.61 5215.39,2789.92 5469.61,2789.92
VEE60V on PWR (split plane): 5744.92,2734.61 5744.92,540.39 5574.61,370.08 4735.39,370.08 4725.08,380.39 4725.08,584.92 5290,584.92 5293.92,585.23 5297.75,586.15 5301.38,587.66 5304.74,589.71 5307.73,592.27 5522.73,807.27 5525.29,810.26 5527.34,813.62 5528.85,817.25 5529.77,821.08 5530.08,825 5530.08,2789.92 5689.61,2789.92
no net on PWR (split plane): 6042.27,60.09 60.09,60.09 60.09,4861.17 6042.27,4861.17

## Keep-outs
Keep-Out Layer:
  lines w10: -5,0 6102.36,0 6102.36,4921.26 -5,4921.26 -5,0

## Other copper
Top Layer:
  rectangle net GND60V: 4835,490 4980,610
  rectangle net GND60V: 4885,2460 5055,2645
  rectangle net OUT1-: 4295,645 4460,670
  rectangle net D3V3: 900,1655 955,1670
  rectangle net GND: 1365,4435 1470,4525
  rectangle net VEE60V: 4720,625 4785,670
  rectangle net A3V3: 990,1720 1020,1780
  rectangle net 3.3V: 3230,2180 3260,2260
  rectangle net 3.3V: 3765,2140 3830,2175
  rectangle net VEE60V: 5525,1110 5670,1225
  rectangle net VEE60V: 4740,410 4810,535
  rectangle net VCC60V: 5315,2380 5445,2540
  rectangle net VCC60V: 4835,630 5040,685
  rectangle net GND5V2: 2325,2575 2425,2660
  rectangle net GND5V2: 4905,705 5025,755
  rectangle net GND5V2: 4715,2465 4860,2645
  rectangle net GND5V1: 1760,2270 1850,2355
GND (plane layer: these items are gaps in the copper):
  lines w40: 1835,0 1835,1725 1795,1765 895,1765 860,1800 860,3200 910,3250 2290,3250
  lines w50: 4870,670 3970,670 3870,570 3870,70 3835,35 2350,35 2295,90 2295,4090 2330,4125 3250,4125 3300,4075 3300,3380 3440,3240 4870,3240 ; 115,240 804.92,240 815,250.08 815,3250 895,3330 2080,3330 2125,3375 2125,4155 2165,4195 3290,4195 3385,4100 3385,3815 3435,3765 3975,3765 4005,3795 4005,4710 3915,4800 380,4800 115,4535 115,240 ; 4810,330 4855,285 5900,285 5940,325 5940,3835 5910,3865 4925,3865 4870,3810 4870,1610 5145,1335 5145,715 5095,665 4850,665 4810,625 4810,330
PWR (plane layer: these items are gaps in the copper):
  lines w50: 4705,610 5290,610 5505,825 5505,2790 5480,2815 ; 5480,2815 5205,2815 5160,2770 5160,1070 4915,825 4735,825 4675,765 4675,665 4700,640 4700,370 4725,345 5585,345 5770,530 5770,2745 5700,2815 5480,2815

## Silkscreen, mask and mechanical layers (free items; w line width, h text height)
Top Overlay:
  lines w10: 395,2075 395,2300 ; 440,1840 540,1840 640,1840 640,2555 ; 440,1845 440,1945 ; 670,2565 770,2565
  text "MENB-C-H-DET-S-V1.2" at 2100,4820 h60
  text "2019.05.27" at 2275,4710 h60
  text "GND" at 295,4155 h30 r90
  text "IN_+12V" at 295,3930 h30 r90
  text "-5V2" at 2415,3210 h20
  text "G5V2" at 2510,3210 h20
  text "5V2" at 2605,3210 h20
  text "+" at 2105,3070 h20
  text "3.3V" at 2715,2825 h60
  text "5V1" at 910,2700 h30
  text "-5V1" at 1120,2695 h30
  text "3.3V" at 3565,2690 h20.48
  text "PA10" at 3430,2685 h30.48
  text "3.3V" at 3760,2685 h20.48
  text "-60V" at 5570,2600 h20
  text "60V" at 5355,2595 h20
  text "GND" at 5475,2595 h20
  text "G5V1" at 1020,2550 h30
  text "3.3V" at 4190,2530 h20.48
  text "GND" at 3870,2525 h30.48
  text "PD8" at 4085,2525 h30.48
  text "5V" at 4290,2525 h30.48
  text "PD9" at 3975,2520 h30.48
  text "+" at 3195,2510 h20
  text "GND" at 3445,2430 h30.48
  text "GND" at 3645,2430 h30.48
  text "SWIO" at 2525,2270 h30
  text "GND5v1" at 2010,2245 h30
  text "5V" at 2000,2135 h30
  text "SWCK" at 2525,2060 h30
  text "5:IN_+12V" at 445,1550 h50
  text "5" at 35,1485 h30 r90
  text "DAC1" at 1800,1415 h30
  text "4" at 35,1328.75 h30 r90
  text "4:12V_Li" at 465,1315 h50
  text "DAC2" at 1805,1295 h30
  text "GND" at 4940,1280 h30.48
  text "3" at 35,1172.5 h30 r90
  text "3:GND" at 470,1155 h50
  text "2" at 35,1016.25 h30 r90
  text "2:Li_CRG+" at 470,1005 h50
  text "+" at 1700,960 h30
  text "GND5V1" at 2040,955 h60
  text "1" at 35,860 h30 r90
  text "1:Li_CRG-" at 475,860 h50
  text "G60V" at 5455,625 h60
  text "Li_CRG-" at 25,220 h30
  text "GND" at 430,215 h30
  text "12V_Li" at 575,215 h30
  text "Li_CRG+" at 330,75 h30 r90
Bottom Overlay:
  text "+" at 3700,1870 h20

## Text inside footprints (layer, text, board x,y; h text height)
P1: Top Overlay "34" at 3080,295 h50; Top Overlay "33" at 3085,190 h50; Top Overlay "1" at 1275,185 h50; Top Overlay "2" at 1260,290 h50
P14: Top Overlay "PA9" at 3760,2430 h30
Q1: Top Overlay "1" at 5445,2305 h59.05 r180; Top Overlay "3" at 5450,2210 h59.05 r180
Q2: Top Overlay "1" at 5660,2305 h59.05 r180; Top Overlay "3" at 5665,2210 h59.05 r180
Q3: Top Overlay "1" at 5440,2065 h59.05 r180; Top Overlay "3" at 5445,1970 h59.05 r180
Q4: Top Overlay "1" at 5660,2065 h59.05 r180; Top Overlay "3" at 5665,1970 h59.05 r180
Q5: Top Overlay "1" at 5110,1860 h59.05; Top Overlay "3" at 5105,1955 h59.05
Q6: Top Overlay "1" at 5210,1725 h59.05; Top Overlay "3" at 5210,1615 h59.05
Q7: Top Overlay "1" at 5340,1545 h59.05; Top Overlay "3" at 5335,1640 h59.05
Q8: Top Overlay "1" at 5550,1545 h59.05; Top Overlay "3" at 5545,1640 h59.05
Q9: Top Overlay "1" at 5340,1295 h59.05; Top Overlay "3" at 5335,1390 h59.05
Q10: Top Overlay "1" at 5550,1295 h59.05; Top Overlay "3" at 5545,1390 h59.05
U3: Top Overlay "1" at 3230,1590 h30; Top Overlay "26" at 3810,1605 h30 r90; Top Overlay "51" at 3780,2230 h30 r180; Top Overlay "76" at 3225,2215 h30 r180